# Altium PCB PCB2.PcbDoc (part 1 of 2)
Units mm, origin at the board's own origin, x right, y up, seen from the top; angles counter-clockwise.
Board outline 84.2 x 135.51 mm, 2 copper layers (Top Layer, Bottom Layer); 89 components, 95 nets, 365 pads, 160 vias.
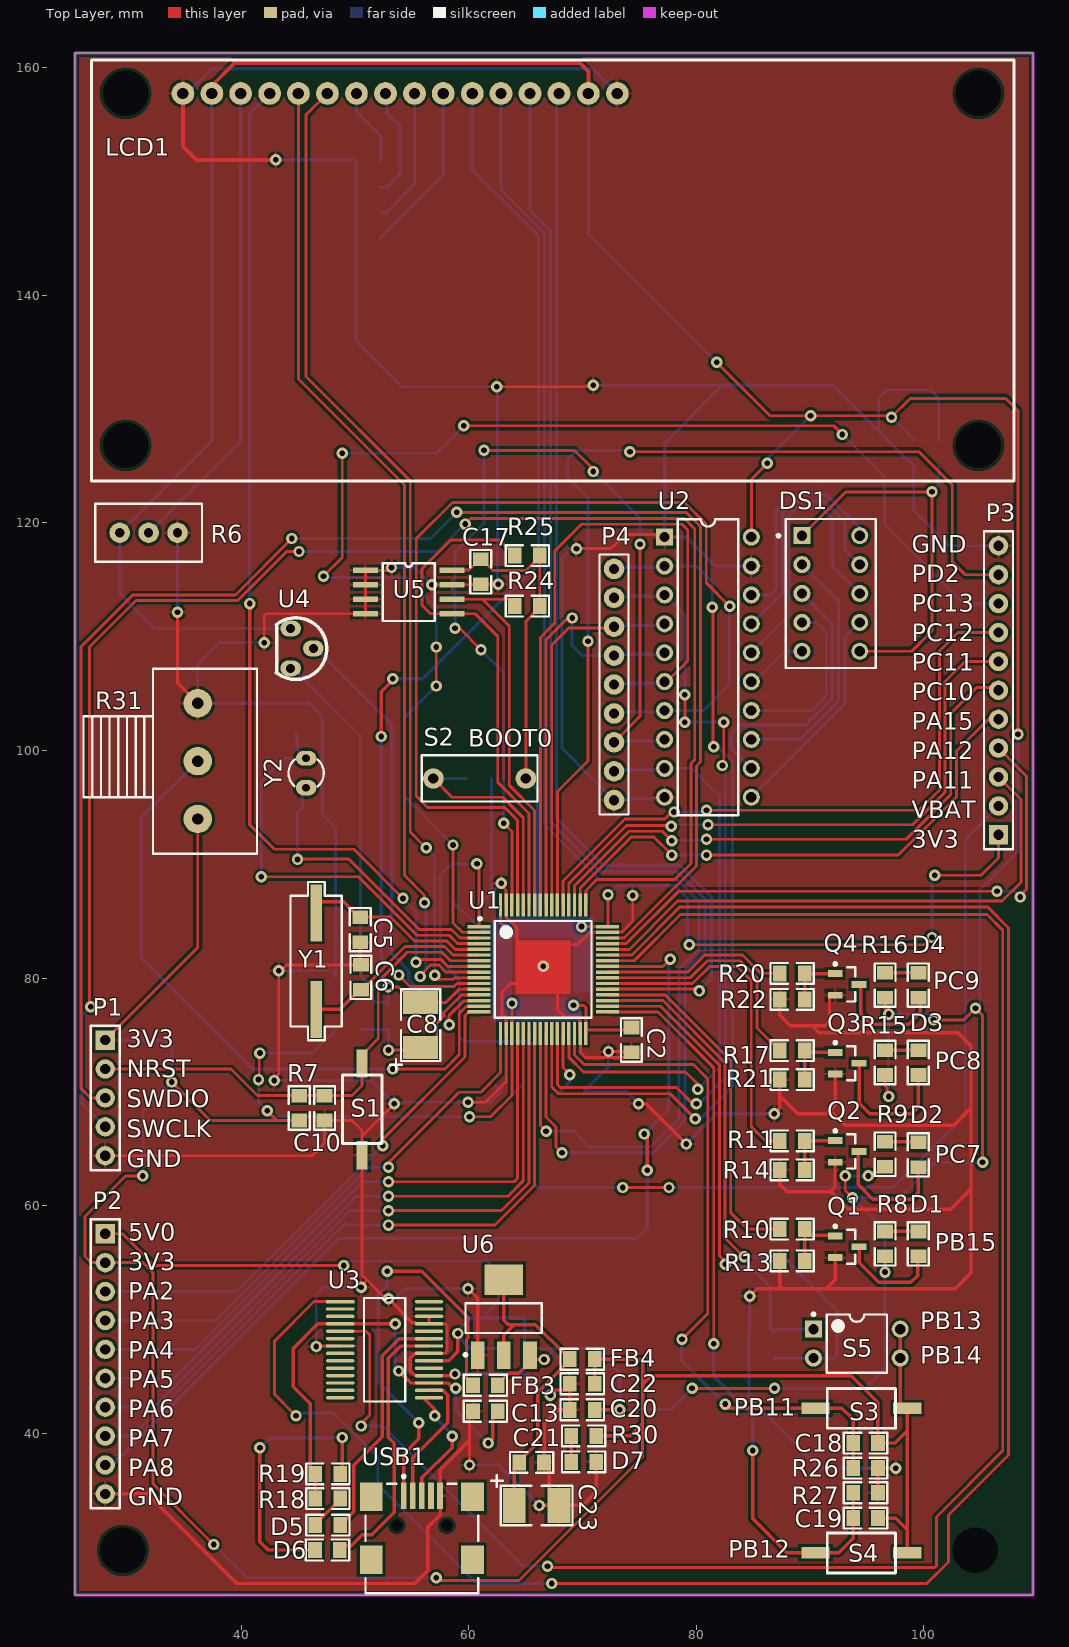
[diagram p0: Top Layer view]
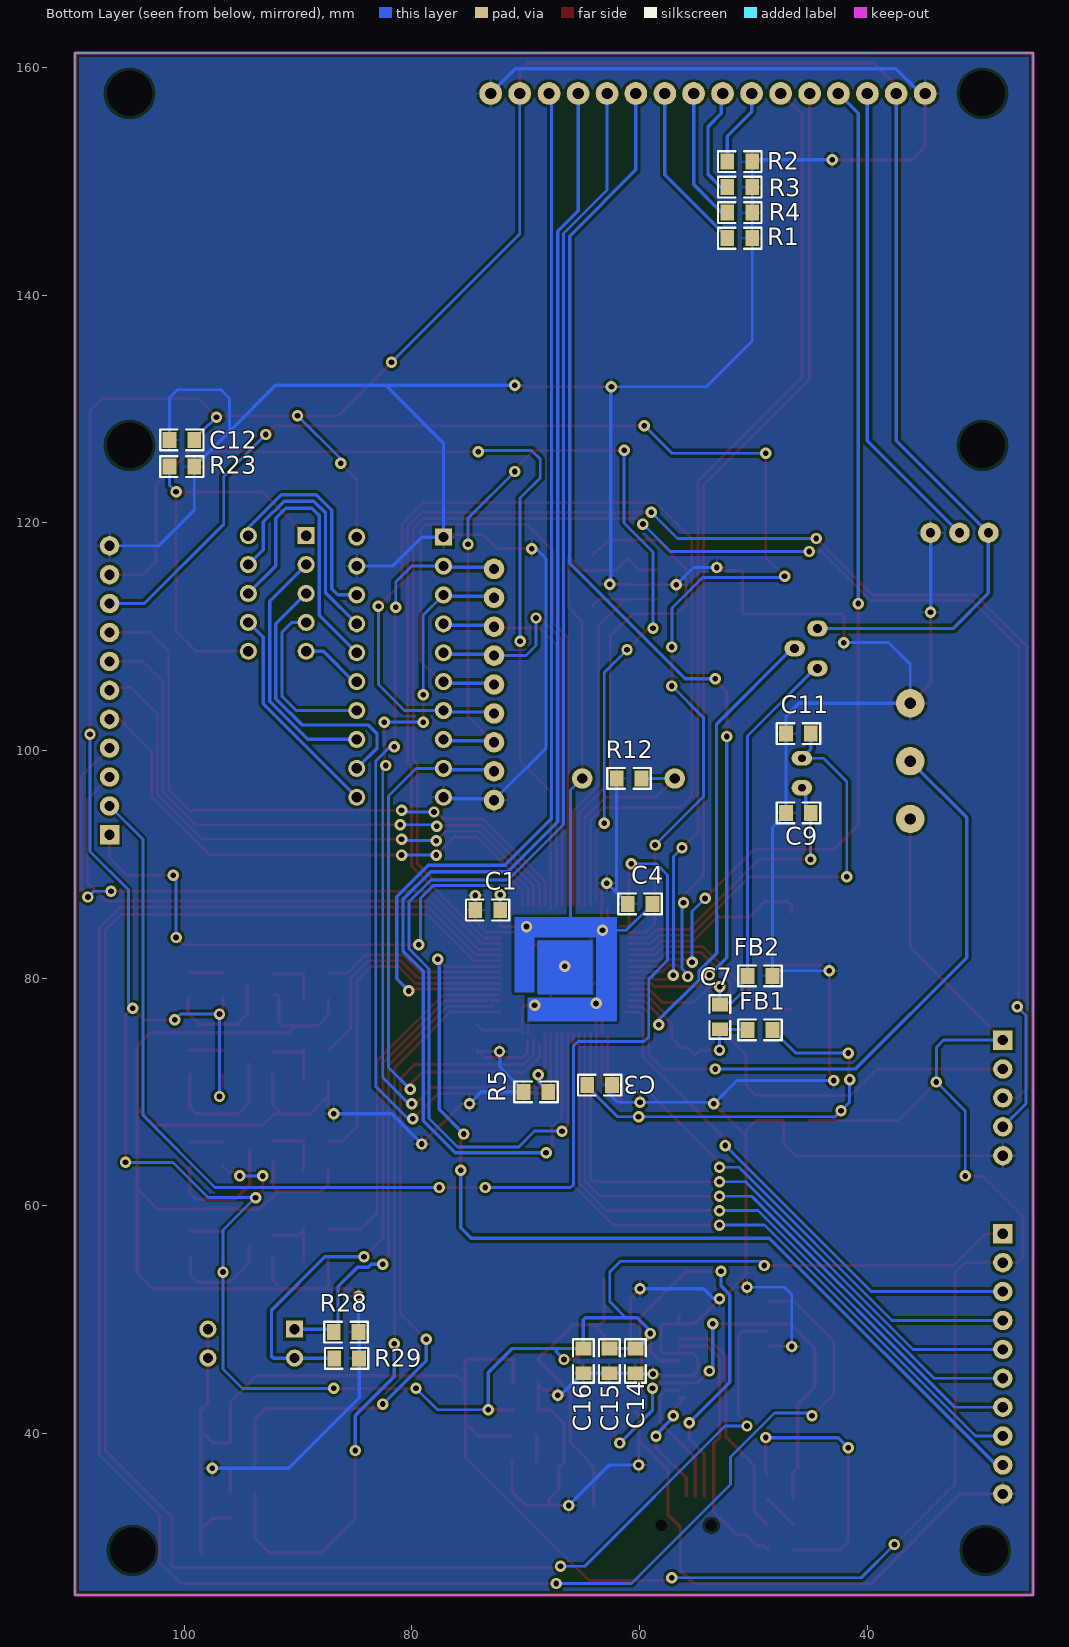
[diagram p1: Bottom Layer view, seen from below]

## Layer stack, top to bottom
Top Solder: solder mask 0.0102, Solder Resist, Dk 3.5
Top Layer: signal copper 0.0356
Dielectric 1: dielectric 0.32, FR-4, Dk 4.8
Bottom Layer: signal copper 0.0356
Bottom Solder: solder mask 0.0102, Solder Resist, Dk 3.5

## Board outline
25.4,25.781 25.4,161.29 109.601,161.29 109.601,25.781

## Design rules (kind name [scope] priority, off if disabled: settings)
Clearance [All] p1: gap=0.25 ignorepadtopadclearanceinfootprint=TRUE except(0.2: Arc-SMDPad Track-SMDPad)
PolygonConnect [All] p1: connectstyle=Relief reliefconductorwidth=0.254 reliefentries=4 polygonreliefangle="90 Angle" airgapwidth=0.254
RoutingVias [All] p1: holewidth=0.5 width=1 viastyle="Through Hole" minholewidth=0.5 minwidth=1 maxholewidth=0.5 maxwidth=1
SolderMaskExpansion [All] p1: expansion=0.102
Width [All] p1: maxlimit=1 minlimit=0.25 preferedwidth=0.3 minimp=50.000000 maximp=50.000000 favimp=50.000000
30 further rules are at their usual default settings.

## Components (designator, comment, footprint, x,y, rotation, side; value= is the part's Value field where it differs from the comment)
C1 "Cap" SMD_805 73.33,85.954 r90 bottom value=100nF
C2 "Cap" SMD_805 74.32,74.559 r180 top value=100nF
C3 "Cap" SMD_805 63.5,70.612 r270 bottom value=100nF
C4 "Cap" SMD_805 59.944,86.487 r90 bottom value=100nF
C5 "Cap" SMD_805 50.495,84.252 r180 top value=18pF
C6 "Cap" SMD_805 50.495,80.061 r0 top value=18pF
C7 "Cap" SMD_805 52.959,76.581 r180 bottom value=100nF
C8 "Cap Pol2" C_B 55.77,75.946 r0 top value=10uF
C9 "Cap" SMD_805 46.025,94.488 r90 bottom value=18pF
C10 "Cap" SMD_805 47.371,68.58 r180 top value=100nF
C11 "Cap" SMD_805 46.025,101.448 r90 bottom value=18pF
C12 "Cap" SMD_805 100.203,127.254 r90 bottom value=100nF
C13 "Cap" SMD_805 61.468,41.91 r90 top value=100nF
C14 "Cap" SMD_805 60.325,46.355 r0 bottom value=100nF
C15 "Cap" SMD_805 62.611,46.355 r0 bottom value=47nF
C16 "Cap" SMD_805 64.897,46.355 r0 bottom value=10nF
C17 "Cap" SMD_805 61.087,115.697 r180 top value=100nF
C18 "Cap" SMD_805 94.869,39.116 r90 top value=100nF
C19 "Cap" SMD_805 94.869,32.512 r90 top value=100nF
C20 "Cap" SMD_805 69.977,42.037 r90 top value=100nF
C21 "Cap" SMD_805 65.532,37.465 r270 top value=100nF
C22 "Cap" SMD_805 69.977,44.323 r90 top value=100nF
C23 "Cap Pol2" C_B 66.04,33.655 r270 top value=100uF
D1 "LED0" SMD_805 99.481,56.642 r0 top
D2 "LED0" SMD_805 99.481,64.465 r0 top
D3 "LED0" SMD_805 99.481,72.578 r0 top
D4 "LED0" SMD_805 99.481,79.375 r0 top
D5 "LED0" SMD_805 47.625,31.903 r90 top
D6 "LED0" SMD_805 47.589,29.718 r90 top
D7 "LED0" SMD_805 70.104,37.465 r90 top
DS1 "Dpy Red-CC" A 91.821,113.792 r0 top
FB1 "FERRIT" SMD_805 49.403,75.474 r270 bottom
FB2 "FERRIT" SMD_805 49.403,80.217 r270 bottom
FB3 "FERRIT" SMD_805 61.468,44.196 r90 top
FB4 "FERRIT" SMD_805 69.977,46.482 r90 top
LCD1 "LCD16*2" LCD2X16 83.439,143.002 r0 top
P1 "Header 5" HDR1X5 28.067,74.549 r270 top
P2 "Header 10" HDR1X10 28.067,57.531 r270 top
P3 "Header 11" HDR1X11 106.553,92.583 r90 top
P4 "Header 9" "ARAY 9" 72.771,108.966 r0 top
Q1 "BC817" SOT23 93.131,56.388 r270 top
Q2 "BC817" SOT23 93.131,64.77 r270 top
Q3 "BC817" SOT23 93.131,72.517 r270 top
Q4 "BC817" SOT23 93.131,79.441 r270 top
R1 "Res1" SMD_805 51.181,145.034 r270 bottom value=10k
R2 "Res1" SMD_805 51.181,151.765 r270 bottom value=10k
R3 "Res1" SMD_805 51.181,149.521 r270 bottom value=10k
R4 "Res1" SMD_805 51.181,147.278 r270 bottom value=10k
R5 "Res1" SMD_805 69.088,69.977 r90 bottom value=10K
R6 "RPot" pot 36.576,116.586 r90 top value=1K
R7 "Res1" SMD_805 45.085,68.58 r0 top value=10K
R8 "Res1" SMD_805 96.56,56.642 r0 top value=680
R9 "Res1" SMD_805 96.56,64.516 r0 top value=680
R10 "Res1" SMD_805 88.426,57.912 r90 top value=1k
R11 "Res1" SMD_805 88.426,65.659 r90 top value=1k
R12 "Res1" SMD_805 60.909,97.511 r90 bottom value=10K
R13 "Res1" SMD_805 88.426,55.118 r90 top value=10k
R14 "Res1" SMD_805 88.426,63.119 r90 top value=10k
R15 "Res1" SMD_805 96.56,72.578 r0 top value=680
R16 "Res1" SMD_805 96.56,79.375 r0 top value=680
R17 "Res1" SMD_805 88.426,73.594 r90 top value=1k
R18 "Res1" SMD_805 47.625,34.29 r270 top value=270
R19 "Res1" SMD_805 47.625,36.449 r270 top value=270
R20 "Res1" SMD_805 88.426,80.391 r90 top value=1k
R21 "Res1" SMD_805 88.426,71.054 r90 top value=10k
R22 "Res1" SMD_805 88.426,78.105 r90 top value=10k
R23 "Res1" SMD_805 100.203,124.968 r270 bottom value=330
R24 "Res1" SMD_805 65.151,112.649 r90 top value=4.7k
R25 "Res1" SMD_805 65.151,117.094 r90 top value=4.7k
R26 "Res1" SMD_805 94.869,36.957 r270 top value=4.7K
R27 "Res1" SMD_805 94.869,34.798 r270 top value=4.7K
R28 "Res1" SMD_805 85.776,48.92 r270 bottom value=4.7K
R29 "Res1" SMD_805 85.725,46.609 r270 bottom value=4.7K
R30 "Res1" SMD_805 70.104,39.751 r90 top value=1K
R31 "RPot" vlume 33.655,94.361 r0 top value=1K
S1 "SW-PB" smd_button 50.8,68.453 r270 top
S2 "SW-SPST" KEY1 60.833,97.536 r180 top
S3 "SW-PB" smd_button 94.488,42.037 r180 top
S4 "SW-PB" smd_button 94.488,29.337 r180 top
S5 "SW DIP-2" DIP-4 94.107,47.879 r0 top
U1 "STM32F103RET6" LQFP64 66.548,80.772 r0 top
U2 "M74HC541B1R" DIP20 81.026,107.315 r270 top
U3 "FT232RL" SOP28 48.715,51.57 r0 top
U4 "LM35" LM35-TO92 44.605,110.216 r0 top
U5 "24C512" SOP8 54.737,114.046 r0 top
U6 "AMS1117-3.3" SOT223 63.119,50.165 r0 top
USB1 "MICRO_USB" MINI_USB 55.753,31.877 r180 top
Y1 "14.7456MHZ" xtal_smd 46.558,81.458 r90 top
Y2 "32.768KHz" XTAL_RTC 45.669,97.942 r180 top

## Footprints (in the part's own frame and the unit in brackets; to place one, negate y for a bottom-side part, rotate by r counter-clockwise, add the part's x,y. Pads: shape width x height; smd on the part's side, far side on the other; paste and mask are expansions set on the pad)
A [mm] "LED, 7-Segment Display, 7.62 mm, RHD; 10 Leads; Row Space 5.08 mm; Pitch 2.54 mm"
  rect 1.5x1.5 hole 0.9: 1(-2.54,5.08)
  round 1.5 hole 0.9: 2(-2.54,2.54) 3(-2.54,0) 4(-2.54,-2.54) 5(-2.54,-5.08) 6(2.54,-5.08) 7(2.54,-2.54) 8(2.54,0) 9(2.54,2.54) 10(2.54,5.08)
  silkscreen extent -4.72,-6.55 3.95,6.55, body extent -3.95,-6.55 3.95,6.55, height 6.34
"ARAY 9" [mm]
  round 1.8 hole 0.9: 1(0,6.985) 2(0,4.445) 3(0,1.905) 4(0,-0.635) 5(0,-3.175) 6(0,-5.715) 7(0,-8.255) 8(0,-10.795) 9(0,-13.335)
  silkscreen extent -1.27,-14.6 1.27,8.25
C_B [mm]
  rect 3.1x2 smd: 1(-0.002,-2.041) 2(-0.002,1.896)
  silkscreen extent -2.67,-4.07 1.73,3.07, body extent -1.4,-1.78 1.4,1.78, height 2.23
DIP20 [mm] "DIP; 20 Leads; Row Spacing 7.62 mm; Pitch 2.54 mm"
  rect 1.5x1.5 hole 0.9: 1(-11.43,-3.81)
  round 1.5 hole 0.9: 2(-8.89,-3.81) 3(-6.35,-3.81) 4(-3.81,-3.81) 5(-1.27,-3.81) 6(1.27,-3.81) 7(3.81,-3.81) 8(6.35,-3.81) 9(8.89,-3.81) 10(11.43,-3.81) 11(11.43,3.81) 12(8.89,3.81) 13(6.35,3.81) 14(3.81,3.81) 15(1.27,3.81) 16(-1.27,3.81) 17(-3.81,3.81) 18(-6.35,3.81) 19(-8.89,3.81) 20(-11.43,3.81)
  silkscreen extent -13,-2.65 13,2.65
DIP-4 [mm] "DIP; 4 Leads; Row Spacing 7.62 mm; Pitch 2.54 mm"
  rect 1.5x1.5 hole 0.9: 1(-3.81,1.27)
  round 1.5 hole 0.9: 2(-3.81,-1.27) 3(3.81,-1.27) 4(3.81,1.27)
  silkscreen extent -3.93,-2.55 2.65,2.69, body extent -3.15,-2.5 3.15,2.5, height 5.6
HDR1X5 [mm] "Connector; Header; 5 Position"
  rect 1.7x1.7 hole 0.9: 1(0,0)
  round 1.7 hole 0.9: 2(2.54,0) 3(5.08,0) 4(7.62,0) 5(10.16,0)
  silkscreen extent -1.27,-1.27 11.43,1.27
HDR1X10 [mm] "Connector; Header; 10 Position"
  rect 1.7x1.7 hole 0.9: 1(0,0)
  round 1.7 hole 0.9: 2(2.54,0) 3(5.08,0) 4(7.62,0) 5(10.16,0) 6(12.7,0) 7(15.24,0) 8(17.78,0) 9(20.32,0) 10(22.86,0)
  silkscreen extent -1.27,-1.27 24.13,1.27
HDR1X11 [mm] "Connector; Header; 11 Position"
  rect 1.7x1.7 hole 0.9: 1(0,0)
  round 1.7 hole 0.9: 2(2.54,0) 3(5.08,0) 4(7.62,0) 5(10.16,0) 6(12.7,0) 7(15.24,0) 8(17.78,0) 9(20.32,0) 10(22.86,0) 11(25.4,0)
  silkscreen extent -1.27,-1.27 26.67,1.27
KEY1 [mm]
  round 1.8 hole 0.9: 1(-4.191,0) 2(3.937,0)
  silkscreen extent -5.21,-2.03 4.95,2.03, body extent -5.21,-2.03 4.95,2.03, height 7.1
LCD2X16 [mm]
  round 0 hole 4: 0(-53.575,-16.2) 0(-53.575,14.725) 0(21.35,-16.2) 0(21.35,14.725)
  round 2 hole 1: 1(-48.55,14.725) 2(-46,14.725) 3(-43.475,14.725) 4(-40.925,14.725) 5(-38.4,14.725) 6(-35.85,14.725) 7(-33.3,14.725) 8(-30.75,14.725) 9(-28.2,14.725) 10(-25.675,14.725) 11(-23.125,14.725) 12(-20.6,14.725) 13(-18.05,14.725) 14(-15.5,14.725) 15(-12.925,14.725) 16(-10.375,14.725)
  silkscreen extent -56.57,-19.32 24.48,17.65
LM35-TO92 [mm]
  oval 1.8x1.4 hole 0.8: 1(-0.25,0.5) 2(1.75,-1.25) 3(-0.25,-3)
  silkscreen extent -1.49,-3.98 2.92,1.44
LQFP64 [mm]
  rect 2x0.3 smd: 1(-5.646,3.75) 2(-5.646,3.25) 3(-5.646,2.75) 4(-5.646,2.25) 5(-5.646,1.75) 6(-5.646,1.25) 7(-5.646,0.75) 8(-5.646,0.25) 9(-5.646,-0.25) 10(-5.646,-0.75) 11(-5.646,-1.25) 12(-5.646,-1.75) 13(-5.646,-2.25) 14(-5.646,-2.75) 15(-5.646,-3.25) 16(-5.646,-3.75) 33(5.646,-3.75) 34(5.646,-3.25) 35(5.646,-2.75) 36(5.646,-2.25) 37(5.646,-1.75) 38(5.646,-1.25) 39(5.646,-0.75) 40(5.646,-0.25) 41(5.646,0.25) 42(5.646,0.75) 43(5.646,1.25) 44(5.646,1.75) 45(5.646,2.25) 46(5.646,2.75) 47(5.646,3.25) 48(5.646,3.75)
  rect 0.3x2 smd: 17(-3.75,-5.646) 18(-3.25,-5.646) 19(-2.75,-5.646) 20(-2.25,-5.646) 21(-1.75,-5.646) 22(-1.25,-5.646) 23(-0.75,-5.646) 24(-0.25,-5.646) 25(0.25,-5.646) 26(0.75,-5.646) 27(1.25,-5.646) 28(1.75,-5.646) 29(2.25,-5.646) 30(2.75,-5.646) 31(3.25,-5.646) 32(3.75,-5.646) 49(3.75,5.646) 50(3.25,5.646) 51(2.75,5.646) 52(2.25,5.646) 53(1.75,5.646) 54(1.25,5.646) 55(0.75,5.646) 56(0.25,5.646) 57(-0.25,5.646) 58(-0.75,5.646) 59(-1.25,5.646) 60(-1.75,5.646) 61(-2.25,5.646) 62(-2.75,5.646) 63(-3.25,5.646) 64(-3.75,5.646)
  silkscreen extent -5.67,-4.25 4.25,4.57
MINI_USB [mm]
  rect 0.5x2.3 smd mask+0.04: 1(1.468,-2.626) 2(0.668,-2.626) 3(-0.132,-2.626) 4(-0.932,-2.626) 5(-1.732,-2.626)
  rect 2x2.5 smd: 6(-4.582,-2.526) 7(-4.582,2.974) 8(4.318,-2.526) 9(4.318,2.974)
  round 0.6 hole 1 unplated: MH1(-2.332,-0.026) MH2(2.068,-0.026)
  silkscreen extent -5.08,-4.45 4.82,5.92, body extent -5.08,-3.38 4.82,5.87, height 3.93
pot [mm]
  round 1.8 hole 0.8: 1(2.54,2.159) 2(2.54,7.239) 3(2.54,4.699)
  silkscreen extent 0,0 5.08,9.4
SMD_805 [mm]
  rect 1.4x1.2 smd: 1(0.025,1.092) 2(0.025,-1.092)
  silkscreen extent -0.89,-1.91 0.94,1.91, body extent -0.66,-1.09 0.71,1.12, height 1.1
smd_button [mm]
  rect 2.5x1 smd: 1(4.013,-0.178) 2(-4.039,-0.178)
  silkscreen extent -3.02,-1.9 2.98,1.6
SOP8 [mm]
  rect 2.2x0.5 smd: 1(-3.81,1.778) 2(-3.81,0.508) 3(-3.81,-0.762) 4(-3.81,-2.032) 5(3.806,-2.032) 6(3.806,-0.762) 7(3.806,0.508) 8(3.806,1.778)
  silkscreen extent -2.29,-2.67 2.29,2.41
SOP28 [mm]
  rect 2.5x0.3 smd: 1(0,0)
  oval 2.5x0.3 smd: 2(0,-0.65) 3(0,-1.3) 4(0,-1.95) 5(0,-2.6) 6(0,-3.25) 7(0,-3.9) 8(0,-4.55) 9(0,-5.2) 10(0,-5.85) 11(0,-6.5) 12(0,-7.15) 13(0,-7.8) 14(0,-8.45) 15(7.8,-8.45) 16(7.8,-7.8) 17(7.8,-7.15) 18(7.8,-6.5) 19(7.8,-5.85) 20(7.8,-5.2) 21(7.8,-4.55) 22(7.8,-3.9) 23(7.8,-3.25) 24(7.8,-2.6) 25(7.8,-1.95) 26(7.8,-1.3) 27(7.8,-0.65) 28(7.8,0)
  silkscreen extent 2.08,-8.78 5.71,0.33
SOT23 [mm]
  rect 0.6x1.3 smd: 1(-0.95,-0.923) 2(0.95,-0.923) 3(0,1.177)
  silkscreen extent -1.92,-1.05 1.5,0.83, body extent -1.5,-0.57 1.5,0.83, height 1.1
SOT223 [mm]
  rect 1.2x2.4 smd: 1(-2.337,-3.302) 2(-0.034,-3.302) 3(2.265,-3.302)
  rect 3.4x2.7 smd: 2(-0.034,3.327)
  silkscreen extent -3.53,-3.4 3.3,1.25, body extent -3.4,-1.9 3.3,1.8, height 1.7
vlume [mm]
  round 2.5 hole 1: 1(2.54,-0.381) 2(2.54,9.779) 3(2.54,4.699)
  silkscreen extent -7.49,-3.43 7.75,12.83
XTAL_RTC [mm]
  oval 1.8x1.4 hole 0.7: 1(-0.051,1.22)
  oval 1.8x1.3 hole 0.7: 2(-0.051,-1.372)
  silkscreen extent -1.6,-1.27 1.5,1.09
xtal_smd [mm]
  rect 5x1 smd: 1(-4.216,-0.051) 2(4.267,-0.051)
  silkscreen extent -6.93,-2.29 6.98,2.21

## Part data
C1 C2 C3 C4 C5 C6 C7 C9 C10 C11 C12 C13 C14 C15 C16 C17 C18 C19 C20 C21 C22: "Capacitor", LatestRevisionDate=17-Jul-2002, LatestRevisionNote="Re-released for DXP Platform.", PackageReference=RAD-0.3, Published=8-Jun-2000, Publisher="Altium Limited"
C8 C23: "Polarized Capacitor (Axial)", LatestRevisionDate=17-Jul-2002, LatestRevisionNote="Re-released for DXP Platform.", PackageReference=POLAR0.8, Published=8-Jun-2000, Publisher="Altium Limited"
D1 D2 D3 D4 D5 D6 D7: "Typical INFRARED GaAs LED", LatestRevisionDate=08-Jul-2005, LatestRevisionNote="Mech Layer 1 removed.", PackageReference=LED-0, Published=8-Jun-2000, Publisher="Altium Limited"
DS1: "7.62 mm Black Surface HER 7-Segment Display: CC, RH DP", Colour="High Efficiency Red (HER)", ComponentLink1Description="Manufacturer Link", ComponentLink1URL=http://www.agilent.com/, DatasheetVersion=19-Feb-2002, LatestRevisionDate=17-Dec-2003, LatestRevisionNote="Schematic revised, PCB Footprint replaced.", MinimumIntensity="360 ucd", Note="IF = 5 mA", PackageDescription="LED, 7-Segment Display, 7.62 mm, RHD; 10 Leads; Row Space 5.08 mm; Pitch 2.54 mm", PackageReference=A, PackageVersion=11-Feb-2002, Published=8-Jun-2000, Publisher="Altium Limited"
FB1 FB2 FB3 FB4: library part Inductor, "Inductor", Code_IEC=1005, Code_JEITA=0402, LatestRevisionDate=29-May-2009, LatestRevisionNote="IPC-7351 Footprint Added.", PackageDescription="Chip Inductor", PackageReference=0402-A, Published=8-Jun-2000, Publisher="Altium Limited"
P1: "Header, 5-Pin", LatestRevisionDate=17-Jul-2002, LatestRevisionNote="Re-released for DXP Platform.", Publisher="Altium Limited"
P2: "Header, 10-Pin", LatestRevisionDate=17-Jul-2002, LatestRevisionNote="Re-released for DXP Platform.", Publisher="Altium Limited"
P3: "Header, 11-Pin", LatestRevisionDate=17-Jul-2002, LatestRevisionNote="Re-released for DXP Platform.", Publisher="Altium Limited"
P4: "Header, 9-Pin", LatestRevisionDate=17-Jul-2002, LatestRevisionNote="Re-released for DXP Platform.", Publisher="Altium Limited"
Q1 Q2 Q3 Q4: library part 2N3904, "NPN General Purpose Amplifier", Code_JEDEC=TO-92A, ComponentLink1Description="Manufacturer Link", ComponentLink1URL=http://www.fairchildsemi.com/, ComponentLink2Description=Datasheet, ComponentLink2URL=http://www.fairchildsemi.com/ds/2N%2F2N3904.pdf, DatasheetVersion=1997, LatestRevisionDate=15-Jan-2003, LatestRevisionNote="PCB Footprint 'BCY-W3/D4.7' replaced", PackageReference=TO-92A, PackageVersion=Sep-1998, Published=8-Jun-2000, Publisher="Altium Limited"
R1 R2 R3 R4 R5 R7 R8 R9 R10 R11 R12 R13 R14 R15 R16 R17 R18 R19 R20 R21 R22 R23 R24 R25 R26 R27 R28 R29 R30: "Resistor", LatestRevisionDate=17-Jul-2002, LatestRevisionNote="Re-released for DXP Platform.", PackageReference=AXIAL-0.3, Published=8-Jun-2000, Publisher="Altium Limited"
R6 R31: "Potentiometer", LatestRevisionDate=17-Jul-2002, LatestRevisionNote="Re-released for DXP Platform.", PackageReference=VR5, Published=8-Jun-2000, Publisher="Altium Limited", Set Position=0.5, Sim Note="Enter the Resistance value and the set point into parameter fields."
  R31: PackageDescription="Variable Resistor, Thru-Hole; 3 Leads"
S1 S3 S4: "Switch", LatestRevisionDate=17-Jul-2002, LatestRevisionNote="Re-released for DXP Platform.", PackageReference=SPST-2, Published=24-Mar-1999, Publisher="Altium Limited"
S2: "Single-Pole, Single-Throw Switch", LatestRevisionDate=17-Jul-2002, LatestRevisionNote="Re-released for DXP Platform.", PackageReference=SPST-2, Published=24-Mar-1999, Publisher="Altium Limited"
S5: "DIP Switch, 2 Position, SPST", LatestRevisionDate=17-Jul-2002, LatestRevisionNote="Re-released for DXP Platform.", PackageReference=DIP-4, Published=24-Mar-1999, Publisher="Altium Limited"
U1: library part STM32F103R8T6, "STM32 ARM-based 32-bit MCU with 64 Kbytes Flash, 64-pin LQFP, Industrial Temperature", ComponentLink1Description="Manufacturer Link", ComponentLink1URL=www.st.com/stm32, ComponentLink2Description=Datasheet, ComponentLink2URL=http://www.st.com/stonline/products/literature/ds/13587.pdf, DatasheetVersion="rev6, Mar-2008", PackageDescription="64-Pin Low-Profile Quad Flat Pack, 10 x 10 mm Body, 0.5 mm Pitch (LQFP64)", PackageReference=LQFP64, PackageVersion=Mar-2008, Published=30-May-2008, Publisher="Altium Limited"
U2: "Octal Bus Buffer with 3 State Outputs (Non Inverted)", Code_JEDEC=MS-015-AE, ComponentLink1Description="Manufacturer Link", ComponentLink1URL=http://www.st.com/, DatasheetVersion=Oct-1993, LatestRevisionDate=06-Jun-2005, LatestRevisionNote="Stylized 3D Model Added.", PackageDescription="DIP; 20 Leads; Row Spacing 7.62 mm; Pitch 2.54 mm", PackageReference=DIP20, PackageVersion=Jun-1998, Published=8-Jun-2000, Publisher="Altium Limited"
U4: "LM35 Temperature Sensor", ComponentLinkURL=www.picpars.com, Designer="Seyed Mohsen Ghasemain", E-mail=picpars@gmail.com
U5: library part 24Cxx
U6: library part LD1117DT33
Y1 Y2: library part XTAL, "Crystal Oscillator", LatestRevisionDate=17-Jul-2002, LatestRevisionNote="Re-released for DXP Platform.", PackageReference=R38, Published=8-Jun-2000, Publisher="Altium Limited"

## Free pads (board coordinates)
  round 2.5 hole 4: 2(29.61,29.718) 2(104.531,29.718)

## Via types
v1: diameter 1, hole 0.5, Top Layer to Bottom Layer, 160 vias

## Nets (pads, with @x,y where several pads share a name; then routed paths per layer and width w, separated by ;. In a path a pad name is that pad's centre, name@x,y a point inside that pad or via, vN(x,y) a via of type N, cw(c..) or ccw(c..) an arc to the next point about the centre after c; other vN are vias at no path point)
3V3: C1.2 C2.2 C3.2 C4.2 C17.2 C18.2 C19.2 C22.2 FB1.1 FB4.2 P1.1 P2.2 P3.1 R7.2 R24.2 R25.2 R30.2 R31.1 S2.1 S3.2 S4.2 S5.3 S5.4 U1.19 U1.32 U1.48 U1.64 U5.8 | length 373.2
  Top Layer w0.25: P1.1 36.195,82.677 R31.1 ; v1(31.369,62.611) 29.845,62.611 26.289,59.055 26.289,55.544 26.842,54.991 P2.2 28.194,54.864 28.321,54.991 31.369,54.991 32.258,54.102 32.258,35.56 v1(37.592,30.226) ; v1(33.909,70.866) 37.287,67.488 43.129,67.488 ; v1(41.529,71.079) 41.593,71.143 41.593,73.343 v1(41.656,73.406) ; v1(42.291,68.326) 43.129,67.488 ; R7.2 43.129,67.488 ; v1(57.15,27.305) 57.404,27.051 64.422,27.051 75.286,37.915 75.286,40.869 75.286,42.799 ; U5.8 58.565,115.846 60.018,115.846 60.962,116.789 C17.2 61.162,116.789 62.127,115.824 65.048,115.824 R25.2@66.243,117.019 ; v1(60.071,67.818) 61.924,67.818 63.798,69.692 U1.19 63.798,75.996 63.803,76.001 63.803,77.764 v1(63.808,77.769) ; U1.64@62.823,86.066 62.798,86.041 62.798,84.852 63.246,84.404 v1(63.246,84.201) ; S2.1 65.024,111.355 66.243,112.574 R24.2 R25.2@66.243,117.019 ; R25.2 R25.2@66.243,117.019 ; v1(69.211,77.597) 70.104,77.597 70.298,77.403 U1.32@70.298,75.43 ; v1(69.917,84.522) U1.48 72.238,84.566 v1(72.238,87.325) ; U1.32 U1.32@70.298,75.43 ; C2.2@74.27,75.895 73.795,75.42 70.307,75.42 U1.32@70.298,75.43 ; v1(79.375,82.931) 100.076,82.931 v1(100.711,83.566) ; v1(100.965,89.027) 105.029,89.027 106.553,90.551 P3.1
  Top Layer w0.3: C22.2 FB4.2 75.11,46.507 75.286,46.332 75.286,44.323 ; R30.2 74.193,39.776 75.286,40.869 ; 75.286,42.799 75.286,44.323 ; C19.2 97.511,32.537 98.527,31.521 ; S5.4 S5.3 97.917,42.565 98.267,42.215 S3.2 98.527,40.234 ; S4.2 98.527,31.521 ; 75.286,44.323 76.033,45.07 93.614,45.07 95.961,42.723 C18.2 97.434,39.141 98.527,40.234 ; 98.527,31.521 98.527,40.234
  Bottom Layer w0.25: P1.1 33.274,74.549 33.909,73.914 v1(33.909,70.866) 31.369,68.326 v1(31.369,62.611) ; v1(37.592,30.226) 40.513,27.305 v1(57.15,27.305) ; v1(41.529,71.079) 41.529,69.088 v1(42.291,68.326) 42.799,67.818 v1(60.071,67.818) 61.924,67.818 C3.2@64.592,70.487 ; v1(41.656,73.406) 46.268,73.406 47.736,74.874 47.836,74.874 48.311,75.349 FB1.1 ; C4.2 58.852,86.412 59.327,85.937 59.427,85.937 61.163,84.201 v1(63.246,84.201) ; S2.1 66.04,96.52 66.04,84.328 ; C1.2 v1(72.238,87.325) 73.036,88.124 78.117,88.124 79.231,87.01 79.231,83.075 v1(79.375,82.931) ; v1(100.711,83.566) 100.711,88.773 v1(100.965,89.027)
3V3A: C7.2 C8.1 FB1.2 U1.13 | length 15.5
  Top Layer w0.25: v1(52.959,73.67) 54.676,73.67 55.105,73.242 C8.1 56.318,73.905 57.193,74.78 57.193,76.028 57.798,76.633 57.798,76.942 59.374,78.518 59.756,78.518 59.76,78.522 U1.13
  Bottom Layer w0.25: FB1.2 50.535,75.489 C7.2 52.959,75.463 v1(52.959,73.67)
5V0: C12.2 C14.2 C15.2 C16.2 C20.2 FB3.2 LCD1.2 LCD1.15 P2.1 R6.2 R8.2 R9.2 R15.2 R16.2 U2.20 U3.20 U4.1 U6.3 | length 402.6
  Top Layer w0.25: P2.1 29.591,57.531 32.385,54.737 v1(49.022,54.737) ; LCD1.2@37.205,158.185 37.439,157.952 LCD1.2 ; v1(79.629,43.942) v1(86.868,43.942) ; v1(81.788,134.112) 86.487,129.413 v1(90.043,129.413) 97.028,129.413 v1(97.155,129.286) 98.806,130.937 107.188,130.937 108.272,129.853 v1(108.272,101.414) ; U2.20 84.836,123.825 v1(86.233,125.222) ; v1(93.091,62.611) 93.091,61.341 v1(93.726,60.706) ; v1(95.123,62.611) 95.326,62.611 95.664,62.949 96.11,62.949 R9.2 ; v1(96.585,54.164) R8.2 ; R15.2 96.585,70.511 96.757,70.339 96.757,69.74 v1(96.901,69.596) ; R16.2 96.585,77.308 96.901,76.992 v1(96.901,76.835) ; v1(100.838,76.327) 103.505,76.327 v1(104.531,77.353) 105.156,76.728 v1(105.156,63.803)
  Top Layer w0.3: U3.20 58.242,46.37 59.055,47.183 v1(59.055,48.768) ; FB3.2 62.56,44.321 63.502,45.263 64.384,45.263 65.384,46.263 U6.3 65.765,46.482 v1(66.624,46.482) ; C20.2 v1(73.279,42.062)
  Top Layer w0.35: LCD1.2@37.205,158.185 39.421,160.401 69.771,160.401 70.514,159.658 LCD1.15
  Bottom Layer w0.25: v1(49.022,54.737) 49.403,55.118 61.657,55.118 62.611,54.164 62.611,51.581 61.169,50.14 ; v1@58.928,49.114 59.02,49.022 v1@59.055,49.022 ; LCD1.15 70.514,145.386 v1(81.788,134.112) ; v1(73.279,42.062) 77.749,42.062 v1(79.629,43.942) ; v1(86.233,125.222) 86.233,125.603 v1(90.043,129.413) ; v1(86.868,43.942) 94.869,43.942 96.585,45.658 v1(96.585,54.164) 96.585,57.847 v1(93.726,60.706) 97.892,60.706 100.99,63.803 v1(105.156,63.803) ; v1(93.091,62.611) v1(95.123,62.611) ; v1(96.901,69.596) v1(96.901,76.835) 100.33,76.835 v1(100.838,76.327) ; v1(97.155,129.286) 97.774,128.667 97.823,128.667 99.111,127.379 C12.2 ; v1(104.531,77.353) 104.902,77.724 104.902,87.757 108.272,91.127 v1(108.272,101.414)
  Bottom Layer w0.3: LCD1.2 37.439,127.228 R6.2 29.337,113.792 32.413,110.716 U4.1 ; v1(59.055,48.768) 59.055,48.546 59.052,48.544 60.149,47.447 C14.2 C15.2 ; v1@59.055,49.022 60.173,50.14 61.169,50.14 64.747,50.14 64.922,49.964 C16.2 67.31,47.447 ; v1(66.624,46.482) 67.31,47.168 67.31,47.447 ; v1(73.279,42.062) 73.279,45.339 71.171,47.447 67.31,47.447
ADClm35: U1.14 U4.2 | length 42.1
  Top Layer w0.25: v1(58.298,75.895) 58.298,76.735 59.56,77.997 60.027,77.997 60.052,78.022 U1.14
  Bottom Layer w0.3: U4.2 46.555,108.966 53.224,102.297 53.224,85.603 53.21,85.589 53.21,82.175 54.748,80.637 54.748,79.868 58.298,76.318 v1(58.298,75.895)
ADCvolume: R31.3 U1.15 | length 57.4
  Top Layer w0.25: v1(53.34,72.009) 57.912,72.009 59.173,73.27 59.173,76.903 59.767,77.497 60.877,77.497 U1.15
  Bottom Layer w0.3: R31.3 31.242,94.107 31.242,81.788 41.021,72.009 v1(53.34,72.009)
BOOT0: R12.2 S2.2 U1.60 | length 19.9
  Top Layer w0.25: S2.2 58.547,95.885 62.992,95.885 64.798,94.079 U1.60
  Bottom Layer w0.25: S2.2 R12.2
D4: LCD1.11 U1.11 | length 95.3
  Top Layer w0.25: v1(53.848,80.264) 54.85,79.262 58.704,79.262 58.96,79.518 59.342,79.518 59.346,79.522 U1.11
  Top Layer w0.3: v1(52.324,101.219) 52.324,105.156 53.34,106.172 v1(53.34,106.299)
  Bottom Layer w0.3: v1(52.324,101.219) 52.324,81.788 v1(53.848,80.264) ; v1(53.34,106.299) 55.973,106.299 66.138,116.464 66.138,145.195 60.314,151.019 LCD1.11
D5: LCD1.12 U1.24 | length 124.3
  Top Layer w0.25: U1.24@66.298,75.333 66.298,67.052 v1(66.802,66.548)
  Bottom Layer w0.25: LCD1.12 62.839,149.236 66.663,145.412 66.663,93.504 71.543,88.624 78.325,88.624 80.25,86.699 80.25,82.569 79.737,82.056 78.481,80.8 78.481,67.667 75.983,65.168 70.595,65.168 69.215,66.548 v1(66.802,66.548)
D6: LCD1.13 U1.25 | length 124.4
  Top Layer w0.25: U1.25 66.798,67.789 67.677,66.91 67.677,65.165 v1(68.199,64.643)
  Bottom Layer w0.3: LCD1.13 65.389,147.429 67.188,145.63 67.188,93.721 71.554,89.355 78.336,89.355 80.775,86.916 80.775,82.351 79.006,80.582 79.006,67.449 76.2,64.643 v1(68.199,64.643)
D7: LCD1.14 U1.37 | length 97.3
  Top Layer w0.25: U1.37 79.906,79.022 80.061,78.867 v1(80.264,78.867) v1@80.12,79.011
  Bottom Layer w0.25: 67.738,93.984 67.713,94.009 67.713,157.501 LCD1.14
  Bottom Layer w0.3: 67.738,93.984 71.817,89.905 78.564,89.905 81.325,87.144 81.325,79.928 v1(80.264,78.867)
EN: LCD1.6 U1.10 | length 87
  Top Layer w0.25: LCD1.6 45.72,155.858 45.72,132.842 54.864,123.698 54.864,92.837 v1(56.261,91.44) ; v1(57.017,80.258) 57.029,80.258 57.398,79.889 58.624,79.889 58.753,80.018 59.135,80.018 59.139,80.022 U1.10
  Bottom Layer w0.25: v1(56.261,91.44) 57.017,90.684 v1(57.017,80.258)
GND: C1.1 C2.1 C3.1 C4.1 C5.1 C6.1 C9.1 C10.1 C11.1 C12.1 C13.1 C14.1 C15.1 C16.1 C17.1 C20.1 C21.1 C22.1 C23.2 D7.2 FB2.1 LCD1.1 LCD1.16 P1.5 P2.10 P3.11 P4.9 Q1.2 Q2.2 Q3.2 Q4.2 R1.1 R2.1 R3.1 R4.1 R5.1 R6.1 R12.1 R13.1 R14.1 R21.1 R22.1 R23.1 R26.1 R27.1 R28.1 R29.1 R31.2 S1.1 U1.18 U1.31 U1.47 U1.63 U2.1 U2.10 U2.19 U3.7 U3.18 U3.21 U3.25 U3.26 U5.1 U5.2 U5.3 U5.4 U5.7 U6.1 USB1.5 | length 775.3
  Top Layer w0.25: P1.5 46.228,64.389 47.346,65.507 C10.1 49.733,67.488 50.622,66.599 50.622,66.116 ; v1(42.037,109.474) 42.037,111.868 42.183,112.014 U5.4 U5.3 U5.2 U5.1 52.959,115.824 v1(53.213,116.078) ; v1(42.926,70.993) 42.926,71.196 43.307,71.577 v1(43.307,80.645) 43.51,80.645 44.018,81.153 C6.1 ; v1(46.609,47.625) 46.654,47.67 U3.7 ; v1(50.546,52.832) 50.546,52.959 51.054,53.467 ; v1(52.959,51.816) 52.705,51.816 51.054,53.467 ; v1(53.467,68.961) 50.622,66.116 ; U3.21 56.525,47.03 57.893,47.03 58.09,47.227 58.09,49.46 57.939,49.61 56.525,49.61 U3.25 ; v1(56.769,114.554) U5.7 61.011,114.554 C17.1 ; v1(59.944,69.088) 61.468,69.088 63.298,70.918 U1.18@63.298,74.469 ; v1(62.458,131.953) 70.739,131.953 v1@70.866,132.08 ; v1(62.865,88.341) 62.865,88.138 63.273,87.73 63.273,86.443 U1.63 63.323,86.393 63.323,85.283 63.53,85.076 63.608,85.076 64.26,84.424 64.26,83.06 ; U1.18 63.273,75.151 63.273,76.427 62.923,76.777 62.923,78.773 63.672,79.522 64.44,79.522 ; 67.437,82.55 67.818,82.931 69.563,82.931 70.654,84.022 U1.47 73.044,84.022 73.069,84.047 73.461,84.047 74.422,85.008 v1(74.422,87.249) ; 67.818,79.629 67.818,77.216 68.453,76.581 69.52,76.581 69.773,76.328 69.773,75.151 U1.31 ; v1(69.469,117.729) 72.514,117.729 73.77,118.985 76.976,118.985 U2.1 ; U1.31@69.823,74.549 69.823,73.471 70.269,73.025 73.584,73.025 C2.1@74.102,73.543 ; v1(72.288,73.543) C2.1@74.102,73.543 ; C2.1@74.27,73.711 C2.1@74.102,73.543 ; C2.1 74.219,73.543 C2.1@74.102,73.543 ; 50.622,66.116 S1.1 50.622,53.899 51.054,53.467
  Top Layer w0.3: P2.10 31.75,34.671 39.624,26.797 55.245,26.797 56.388,27.94 56.388,31.75 57.485,32.847 USB1.5 57.485,36.784 60.071,39.37 ; v1(34.417,112.141) 34.417,105.918 R31.2 ; C5.1 50.47,81.204 C6.1 ; v1(52.959,51.816) 55.055,49.72 55.315,49.72 55.415,49.62 U3.25 U3.26 ; U3.21 55.287,47.02 54.865,46.598 54.865,45.492 55.287,45.07 U3.18 58.47,45.07 58.612,45.212 v1(58.801,45.212) ; v1(59.944,52.705) 60.782,51.867 U6.1 ; v1(60.071,37.211) 60.071,39.37 ; C13.1 60.071,41.631 60.071,39.37 ; C17.1 v1(62.611,114.605) ; v1(66.199,33.657) C23.2 ; v1(67.183,43.348) 67.634,43.798 68.435,43.798 C22.1@68.885,44.248 ; C22.1 C22.1@68.885,44.248 ; v1@70.866,132.08 v1(70.942,132.08) ; D7.2 71.196,34.849 70.004,33.657 C23.2 ; v1(74.924,68.961) 75.582,68.961 v1(79.121,65.422) ; v1(84.684,52.045) 84.706,52.045 85.367,52.705 87.63,52.705 ; v1(86.859,68.072) 87.334,68.547 87.334,69.638 ; R13.1 87.334,53.001 87.63,52.705 ; R14.1 87.334,61.891 88.011,61.214 91.756,61.214 ; R21.1 87.334,69.638 ; R22.1 87.334,76.75 88.265,75.819 90.17,75.819 ; Q1.2 92.208,53.473 91.44,52.705 ; Q2.2 92.191,63.803 92.191,61.649 91.756,61.214 ; Q3.2 92.208,68.84 91.44,68.072 ; Q4.2 91.858,78.491 91.708,78.341 91.708,76.205 91.322,75.819 90.17,75.819 ; R27.1 R26.1 v1(97.536,36.932) ; C23.2 67.936,34.207 67.074,35.069 67.074,36.99 C21.1 66.624,40.852 67.835,42.062 C20.1 C22.1@68.885,44.248 ; 87.334,69.638 88.9,68.072 91.44,68.072 ; 87.63,52.705 91.44,52.705 ; 90.17,75.819 90.805,75.184 102.997,75.184 104.14,74.041 104.14,68.58 ; 91.44,52.705 102.743,52.705 104.14,54.102 104.14,61.468 ; 91.44,68.072 92.075,68.072 93.091,67.056 102.616,67.056 104.14,68.58 ; 91.756,61.214 91.821,61.214 93.345,59.69 102.362,59.69 104.14,61.468 ; 104.14,61.468 104.14,68.58
  Top Layer w0.35: LCD1.1 34.889,153.071 36.068,151.892 v1(43.053,151.892)
  Bottom Layer w0.25: R31.2 36.195,107.569 38.1,109.474 v1(42.037,109.474) ; v1(42.926,70.993) 51.435,70.993 v1(53.467,68.961) 53.594,69.088 v1(59.944,69.088) 61.924,69.088 62.865,70.029 C3.1@62.408,70.487 ; v1(43.307,80.645) 47.857,80.645 FB2.1 48.311,93.22 47.117,94.413 C9.1 ; v1(46.609,47.625) 46.609,52.197 47.244,52.832 v1(50.546,52.832) ; R2.1 R3.1 R4.1 R1.1 50.089,135.966 54.102,131.953 v1(62.458,131.953) ; v1(53.213,116.078) 55.245,116.078 v1(56.769,114.554) ; R12.1 62.001,87.578 61.036,86.612 C4.1 v1(62.865,88.341) ; v1(69.469,117.729) 69.356,117.616 68.975,117.616 68.213,116.854 68.213,100.189 P4.9 ; R5.1 70.18,70.102 72.263,72.185 v1@72.263,73.787 ; C1.1 v1(74.422,87.249) ; 96.012,128.041 96.012,130.937 96.774,131.699 100.584,131.699 101.295,130.988 C12.1 ; R23.1 99.111,121.107 102.235,117.983 P3.11
  Bottom Layer w0.3: v1(34.417,112.141) R6.1 ; LCD1.1 35.299,157.727 37.465,159.893 70.898,159.893 LCD1.16 ; R31.2 45.974,104.14 47.117,102.997 C11.1 C9.1 ; v1(43.053,151.892) 49.936,151.892 R2.1 ; v1(52.959,51.816) 53.467,51.816 54.356,52.705 v1(59.944,52.705) ; v1(58.801,45.212) 60.3,45.212 C14.1 C15.1 C16.1 65.022,45.263 66.803,43.482 67.049,43.482 v1(67.183,43.348) ; v1(60.071,37.211) 62.645,37.211 v1(66.199,33.657) ; v1(62.458,131.953) 62.535,131.876 62.535,114.681 v1(62.611,114.605) ; R5.1 73.883,70.002 v1(74.924,68.961) ; v1(70.942,132.08) 82.296,132.08 ; P4.9 72.898,95.758 77.089,95.758 U2.10 ; v1(79.121,65.422) 81.771,68.072 v1(86.859,68.072) ; v1(84.684,52.045) R28.1 84.633,48.844 R29.1 84.633,43.129 90.83,36.932 v1(97.536,36.932) ; U2.19 81.661,116.205 79.121,118.745 U2.1 77.216,127 82.296,132.08 ; R23.1 99.111,125.043 98.661,125.493 98.561,125.493 96.012,128.041 91.973,132.08 82.296,132.08
  other v1: 66.548,81.026
GNDA: C7.1 C8.2 FB2.2 U1.12 U4.3 | length 44.3
  Top Layer w0.25: v1(52.934,79.223) 53.838,79.223 55.218,77.842 C8.2 57.991,77.842 59.167,79.018 59.549,79.018 59.553,79.022 60.027,79.022 U1.12
  Bottom Layer w0.25: U4.3 44.555,107.216 50.495,101.276 FB2.2 50.97,79.717 50.97,78.739 51.859,77.851 52.756,77.851 C7.1 v1(52.934,79.223)
LED1: R10.1 U1.36 | length 31.4
  Top Layer w0.25: U1.36@72.332,78.522 77.27,78.522 83.034,72.758 83.034,59.378 84.474,57.937 R10.1
LED2: R11.1 U1.38 | length 29.6
  Top Layer w0.25: U1.38 79.682,79.522 81.182,81.022 83.57,81.022 84.828,79.764 84.828,66.937 86.081,65.684 R11.1
LED3: R17.1 U1.39 | length 21.6
  Top Layer w0.25: U1.39 79.474,80.022 80.974,81.522 83.852,81.522 85.344,80.03 85.344,75.609 R17.1
LED4: R20.1 U1.40 | length 16.4
  Top Layer w0.25: U1.40 79.267,80.522 80.767,82.022 84.059,82.022 85.665,80.416 R20.1
MCU_RX1: U1.43 U3.1 | length 176.1
  Top Layer w0.25: v1(44.831,41.529) 42.926,43.434 42.926,48.086 46.41,51.57 U3.1 ; v1(67.31,26.797) 100.256,26.797 102.156,28.697 102.156,32.814 107.434,38.092 107.434,84.408 105.609,86.233 78.547,86.233 74.336,82.022 U1.43
  Bottom Layer w0.25: v1(44.831,41.529) 45.085,41.783 48.133,41.783 52.006,37.91 52.006,35.496 60.706,26.797 v1(67.31,26.797)
MCU_TX1: U1.42 U3.5 | length 162.1
  Top Layer w0.25: U3.5 50.979,48.97 51.308,48.641 51.308,41.605 50.546,40.843 v1(50.546,40.64) ; v1(66.929,28.321) 67.056,28.194 100.946,28.194 101.092,28.34 101.092,32.639 106.934,38.481 106.934,84.201 105.537,85.598 78.619,85.598 74.543,81.522 U1.42
  Bottom Layer w0.25: v1(50.546,40.64) 52.477,40.64 64.796,28.321 v1(66.929,28.321)
NetC9_2: C9.2 U1.3 Y2.1 | length 25.5
  Top Layer w0.25: v1(44.958,90.424) 44.991,90.457 49.464,90.457 55.66,84.262 58.493,84.262 59.233,83.522 U1.3
  Bottom Layer w0.25: C9.2 44.958,94.488 v1(44.958,90.424)
  Bottom Layer w0.3: C9.2 45.383,94.963 45.383,96.385 Y2.1
NetC11_2: C11.2 U1.4 Y2.2 | length 37.2
  Top Layer w0.25: v1(41.783,88.9) 50.314,88.9 55.452,83.762 58.286,83.762 59.026,83.022 60.027,83.022 U1.4
  Bottom Layer w0.25: v1(41.783,88.9) 41.783,97.282 43.815,99.314 Y2.2
  Bottom Layer w0.3: C11.2 44.933,100.122 45.72,99.335 Y2.2
NetC21_2: C21.2 C23.1 FB4.1 U6.2 | length 28.8
  Top Layer w0.3: U6.2@63.085,46.863 63.085,48.607 64.008,49.53 ; U6.2@63.085,53.492 63.085,49.945 63.5,49.53 64.008,49.53 ; C23.1 63.999,36.999 C21.2 64.44,37.54 66.074,39.174 66.074,43.597 68.885,46.407 FB4.1 68.885,46.607 68.435,47.057 68.335,47.057 65.862,49.53 64.008,49.53
NetD1_1: D1.1 R8.1 | length 2.9
  Top Layer w0.3: R8.1 D1.1
NetD1_2: D1.2 Q1.3 | length 9.2
  Top Layer w0.3: Q1.3 94.308,54.991 96.035,53.264 98.857,53.264 99.441,53.848 99.441,55.484 D1.2
NetD2_1: D2.1 R9.1 | length 2.9
  Top Layer w0.3: R9.1 99.456,65.608 D2.1
NetD2_2: D2.2 Q2.3 | length 11.2
  Top Layer w0.3: Q2.3 94.223,64.685 94.223,61.86 95.504,60.579 98.933,60.579 99.506,61.152 D2.2
NetD3_1: D3.1 R15.1 | length 2.9
  Top Layer w0.3: R15.1 D3.1
NetD3_2: D3.2 Q3.3 | length 12.2
  Top Layer w0.3: Q3.3 94.308,69.014 95.25,68.072 98.933,68.072 99.506,68.645 D3.2
NetD4_1: D4.1 R16.1 | length 2.9
  Top Layer w0.3: R16.1 D4.1
NetD4_2: D4.2 Q4.3 | length 10.2
  Top Layer w0.3: Q4.3 94.465,79.441 94.465,76.858 95.388,75.935 98.671,75.935 99.695,76.959 99.695,78.094 D4.2
NetD5_1: D5.1 R18.1 | length 3.3
  Top Layer w0.3: D5.1 46.533,32.028 48.219,33.715 48.267,33.715 48.717,34.165 R18.1
NetD5_2: D5.2 U3.23 | length 21.2
  Top Layer w0.3: D5.2 49.909,33.121 49.909,37.207 52.398,39.695 52.398,46.826 53.892,48.32 U3.23
NetD6_1: D6.1 R19.1 | length 24.3
  Top Layer w0.3: v1(41.656,38.735) 41.656,30.48 42.393,29.743 D6.1 ; R19.1 48.895,36.601 v1(48.895,39.624)
  Bottom Layer w0.3: v1(41.656,38.735) 42.545,39.624 v1(48.895,39.624)
NetD6_2: D6.2 U3.22 | length 24
  Top Layer w0.3: D6.2@48.681,29.843 D6.2 49.057,30.119 49.677,30.119 50.635,31.077 51.473,31.077 53.456,33.06 53.456,39.127 52.948,39.635 52.948,46.598 54.02,47.67 U3.22
NetD7_1: D7.1 R30.1 | length 2.3
  Top Layer w0.3: D7.1 R30.1
NetDS1_1: DS1.1 DS1.6 R23.2 | length 34.8
  Top Layer w0.25: DS1.1 93.127,122.718 v1(100.711,122.718) 100.711,110.49 98.933,108.712 DS1.6
  Bottom Layer w0.25: v1(100.711,122.718) 101.295,123.302 R23.2
NetDS1_2: DS1.2 U2.13 | length 22.4
  Bottom Layer w0.3: U2.13 89.138,100.965 92.494,104.32 92.494,113.119 DS1.2
NetDS1_3: DS1.3 U2.12 | length 24.3
  Bottom Layer w0.3: U2.12 83.055,100.206 83.055,101.47 83.82,102.235 89.63,102.235 91.944,104.548 91.944,111.129 DS1.3
NetDS1_4: DS1.4 U2.14 | length 15.3
  Bottom Layer w0.25: U2.14 90.158,103.505 91.419,104.766 91.419,110.384 90.551,111.252 DS1.4
  Bottom Layer w0.3: DS1.4@89.281,111.125 DS1.4
NetDS1_5: DS1.5 U2.15 | length 5.5
  Bottom Layer w0.3: U2.15 85.09,106.045 87.757,108.712 DS1.5
NetDS1_7: DS1.7 U2.11 | length 19.3
  Bottom Layer w0.3: U2.11 93.044,104.093 93.044,109.935 DS1.7
NetDS1_8: DS1.8 U2.16 | length 25.5
  Bottom Layer w0.3: U2.16 88.131,111.88 88.131,120.643 88.773,121.285 91.073,121.285 91.948,120.41 91.948,116.205 DS1.8
NetDS1_9: DS1.9 U2.17 | length 21.8
  Bottom Layer w0.3: U2.17 87.581,113.87 87.581,120.871 88.622,121.912 91.224,121.912 93.044,120.092 93.044,117.649 DS1.9
NetDS1_10: DS1.10 U2.18 | length 19.1
  Bottom Layer w0.3: U2.18 86.487,113.665 87.031,114.209 87.031,121.099 88.394,122.462 91.452,122.462 94.361,119.553 DS1.10
NetFB3_1: FB3.1 USB1.1 | length 37.1
  Top Layer w0.25: 59.955,49.911 59.955,48.366 59.807,48.218 59.807,44.79 FB3.1
  Top Layer w0.3: v1(52.832,54.229) 55.88,54.229 59.955,50.154 59.955,49.911 ; USB1.1 54.285,38.171 55.626,39.512 v1(55.626,40.915)
  Bottom Layer w0.3: v1(52.832,54.229) 52.832,52.962 52.059,52.189 52.059,44.482 v1(55.626,40.915)
NetLCD1_3: LCD1.3 R6.3 | length 42
  Bottom Layer w0.3: R6.3 39.964,127.213 LCD1.3
NetLCD1_7: LCD1.7 R2.2 | length 6.9
  Bottom Layer w0.3: LCD1.7 50.139,156.109 52.273,153.975 R2.2
NetLCD1_8: LCD1.8 R3.2 | length 9.8
  Bottom Layer w0.25: LCD1.8 LCD1.8@52.817,157.599
  Bottom Layer w0.3: R3.2 52.849,149.496 53.975,150.622 53.975,154.813 52.817,155.971 LCD1.8@52.817,157.599
NetLCD1_9: LCD1.9 R4.2 | length 12
  Bottom Layer w0.25: R4.2 R4.2@52.764,147.252
  Bottom Layer w0.3: R4.2@52.764,147.252 55.239,149.727 LCD1.9
NetLCD1_10: LCD1.10 R1.2 | length 15
  Bottom Layer w0.25: R1.2 R1.2@52.273,145.109
  Bottom Layer w0.3: R1.2@52.273,145.109 57.764,150.599 LCD1.10
NetQ1_1: Q1.1 R10.2 R13.2 | length 5.7
  Top Layer w0.3: R13.2 R10.2@89.518,57.837 ; R10.2 R10.2@89.518,57.837 ; Q1.1 92.159,57.387 89.968,57.387 R10.2@89.518,57.837
NetQ2_1: Q2.1 R11.2 R14.2 | length 5.2
  Top Layer w0.3: R14.2 R11.2 89.554,65.72 Q2.1
NetQ3_1: Q3.1 R17.2 R21.2 | length 5.3
  Top Layer w0.3: R21.2 R17.2 89.671,73.467 Q3.1
NetQ4_1: Q4.1 R20.2 R22.2 | length 5
  Top Layer w0.3: R22.2 R20.2 89.544,80.391 Q4.1
NetR5_2: R5.2 U1.28 | length 5.7
  Top Layer w0.25: U1.28 68.298,72.152 68.885,71.565 v1(68.885,71.501)
  Bottom Layer w0.25: R5.2 68.885,70.891 v1(68.885,71.501)
NetU3_15: U3.15 USB1.3 | length 11.3
  Top Layer w0.3: USB1.3 55.885,36.073 58.543,38.731 v1(58.543,39.751) ; U3.15 56.007,43.12 57.023,42.104 v1(57.023,41.529)
  Bottom Layer w0.3: v1(57.023,41.529) 57.023,41.4 58.543,39.88 v1(58.543,39.751)
NetU3_16: U3.16 USB1.2 | length 11.9
  Top Layer w0.3: USB1.2 55.085,37.835 58.165,40.915 58.165,43.348 57.743,43.77 U3.16
NRST: C10.2 P1.2 R7.1 S1.2 U1.7 | length 43.8
  Top Layer w0.25: P1.2 39.108,72.009 41.445,69.672 R7.1 C10.2 49.733,69.672 50.622,70.561 S1.2 50.622,73.242 52.059,74.678 52.059,79.699 52.973,80.614 52.973,80.626 54.609,82.262 57.664,82.262 58.404,81.522 U1.7
OSC_IN: C5.2 U1.5 Y1.2 | length 16.9
  Top Layer w0.25: C5.2@50.439,85.375 53.132,85.375 55.245,83.262 58.079,83.262 58.819,82.522 U1.5
  Top Layer w0.3: Y1.2 46.609,86.342 46.959,86.692 49.019,86.692 49.74,85.97 49.744,85.97 50.37,85.344 C5.2 C5.2@50.439,85.375
OSC_OUT: C6.2 U1.6 Y1.1 | length 16.9
  Top Layer w0.25: C6.2@50.421,78.969 C6.2 50.621,78.969 52.473,80.821 52.473,80.834 54.401,82.762 57.871,82.762 58.611,82.022 U1.6
  Top Layer w0.3: Y1.1 48.693,77.241 C6.2@50.421,78.969
PA2: P2.3 U1.16 | length 45.8
  Top Layer w0.25: v1(52.451,65.278) 52.451,65.841 59.673,73.063 59.673,75.802 59.69,75.819 59.69,76.713 59.974,76.997 61.181,76.997 U1.16@61.231,77.047
  Bottom Layer w0.25: P2.3 39.624,52.451 v1(52.451,65.278)
PA3: P2.4 U1.17 | length 47.1
  Top Layer w0.25: v1(52.959,63.373) 52.959,63.763 59.159,69.963 61.073,69.963 62.798,71.688 U1.17@62.798,74.797
  Bottom Layer w0.25: P2.4 37.791,49.911 51.253,63.373 v1(52.959,63.373)
PA4: P2.5 U1.20 | length 55.2
  Top Layer w0.25: v1@52.948,62.103 v1(52.959,62.103) 64.008,62.103 64.298,62.393 U1.20
  Bottom Layer w0.25: P2.5 35.958,47.371 50.69,62.103 v1@52.948,62.103
PA5: P2.6 U1.21 | length 56.9
  Top Layer w0.25: v1(52.959,60.833) 63.445,60.833 64.798,62.186 U1.21
  Bottom Layer w0.25: P2.6 34.125,44.831 50.127,60.833 v1(52.959,60.833)
PA6: P2.7 U1.22 | length 58.5
  Top Layer w0.25: v1(52.959,59.563) 62.882,59.563 65.298,61.979 U1.22
  Bottom Layer w0.25: P2.7 32.292,42.291 49.564,59.563 v1(52.959,59.563)
PA7: P2.8 U1.23 | length 60.1
  Top Layer w0.25: v1(52.959,58.293) 62.319,58.293 65.798,61.772 U1.23
  Bottom Layer w0.25: P2.8 30.46,39.751 49.002,58.293 v1@52.832,58.293
PA8: P2.9 U1.41 | length 87
  Top Layer w0.25: U1.41 77.085,81.022 v1(77.724,81.661)
  Top Layer w0.3: v1(75.438,66.294) 75.692,66.04 v1(75.692,63.119)
  Bottom Layer w0.3: P2.9 28.662,37.211 48.601,57.15 74.778,57.15 75.692,58.064 v1(75.692,63.119) ; v1(75.438,66.294) 77.597,68.453 77.597,81.534 v1(77.724,81.661) 77.802,81.661 v1@77.978,81.485
PA11: P3.3 U1.44 | length 48.8
  Top Layer w0.25: U1.44 74.129,82.522 78.362,86.755 106.854,86.755 108.52,88.421 108.52,95.696 P3.3
PA12: P3.4 U1.45 | length 53.4
  Top Layer w0.25: U1.45 73.851,83.022 78.459,87.63 v1(106.426,87.63) ; P3.4@107.188,100.203 P3.4 109.02,97.736 109.02,87.798 108.458,87.236 v1(108.458,87.122)
  Bottom Layer w0.25: v1(106.426,87.63) 107.95,87.63 v1(108.458,87.122)
PA15: P3.5 U1.50 | length 48.1
  Top Layer w0.25: U1.50 69.798,87.904 74.288,92.394 76.262,92.394 v1(77.851,90.805) ; v1(80.899,90.805) 97.752,90.805 102.862,95.915 102.862,99.941 105.664,102.743 P3.5
  Bottom Layer w0.25: v1(77.851,90.805) v1(80.899,90.805)
PB1: C18.1 R26.2 S3.1 U1.30 | length 61.1
  Top Layer w0.25: U1.30@69.298,74.549 69.302,74.545 69.302,73.249 70.161,72.39 79.756,72.39 81.012,71.134 81.012,50.532 v1(78.74,48.26)
  Top Layer w0.3: v1(82.55,42.565) 82.55,42.545 82.88,42.215 S3.1 92.786,42.215 93.777,41.224 C18.1 R26.2
  Bottom Layer w0.3: v1(78.74,48.26) 78.74,46.375 v1(82.55,42.565)
PB2: C19.1 R27.2 S4.1 U1.33 | length 67
  Top Layer w0.25: U1.33 72.589,77.022 72.614,76.997 73.028,76.997 73.053,77.022 76.624,77.022 81.534,72.112 v1(81.534,47.879)
  Top Layer w0.3: v1(84.963,38.481) 84.963,32.512 87.96,29.515 S4.1 92.507,29.515 93.777,30.785 C19.1 R27.2
  Bottom Layer w0.3: v1(81.534,47.879) 81.534,44.989 84.963,41.56 v1(84.963,38.481)
PC10: P3.6 U1.51 | length 51.1
  Top Layer w0.25: U1.51 69.298,88.111 74.081,92.894 77.006,92.894 77.824,92.075 v1(77.851,92.075) ; v1(80.899,92.202) 98.442,92.202 102.362,96.122 102.362,103.251 104.648,105.537 106.299,105.537 P3.6
  Bottom Layer w0.25: v1(77.851,92.075) 80.772,92.075 v1(80.899,92.202)
PC11: P3.7 U1.52 | length 53.5
  Top Layer w0.25: U1.52 68.798,88.318 73.873,93.394 77.743,93.394 v1(77.812,93.325) ; v1(81.026,93.472) 99.005,93.472 101.862,96.329 101.862,106.053 103.632,107.823 P3.7
  Bottom Layer w0.25: v1(77.812,93.325) 77.959,93.472 v1(81.026,93.472)
PC12: P3.8 U1.53 | length 56.6
  Top Layer w0.25: U1.53 68.298,88.542 73.736,93.98 77.229,93.98 77.844,94.595 v1(78.047,94.595) ; v1(80.899,94.742) 99.568,94.742 101.362,96.536 101.362,108.728 102.997,110.363 P3.8
  Bottom Layer w0.25: v1(78.047,94.595) 80.752,94.595 v1(80.899,94.742)
PC13: P3.9 U1.2 | length 123.3
  Top Layer w0.25: v1(47.244,115.316) 48.895,116.967 v1(48.895,126.111) ; v1(57.15,105.664) v1(57.15,109.093) ; v1(58.624,91.694) 58.624,84.85 59.446,84.028 ; 59.44,84.022 U1.2 ; v1(59.563,128.524) 92.075,128.524 v1(92.837,127.762)
  Bottom Layer w0.25: v1(47.244,115.316) 47.357,115.203 54.469,115.203 57.15,112.522 v1(57.15,109.093) ; v1(48.895,126.111) 57.15,126.111 v1(59.563,128.524) ; v1(57.15,105.664) 54.356,102.87 54.356,95.962 v1(58.624,91.694) ; v1(92.837,127.762) 96.528,124.071 96.528,119.88 103.505,112.903 P3.9
PD2: P3.10 U1.54 | length 88
  Top Layer w0.25: U1.54@67.773,86.065 67.798,86.09 U1.54 67.798,96.386 70.485,99.073 v1(70.485,109.601) ; v1(74.168,126.238) 99.568,126.238 102.489,123.317 102.489,116.586 103.632,115.443 P3.10
  Bottom Layer w0.25: v1(70.485,109.601) 70.485,122.174 68.707,123.952 68.707,125.603 69.469,126.365 74.041,126.365 v1(74.168,126.238)
RS: LCD1.4 U1.8 | length 93.1
  Top Layer w0.25: 40.767,93.472 42.926,91.313 49.911,91.313 v1(54.229,86.995) ; v1(55.372,81.387) 55.575,81.387 55.821,81.633 57.586,81.633 58.197,81.022 U1.8
  Top Layer w0.3: 40.767,93.472 v1(40.767,112.903)
  Bottom Layer w0.25: v1(54.229,86.995) 55.372,85.852 v1(55.372,81.387)
  Bottom Layer w0.3: v1(40.767,112.903) 40.767,155.98 LCD1.4
RW: LCD1.5 U1.9 | length 88.3
  Top Layer w0.25: LCD1.5 45.039,132.634 54.356,123.317 54.356,89.027 56.12,87.263 v1(56.12,86.628) ; v1(55.753,80.137) 55.753,80.231 56.654,81.133 57.379,81.133 57.99,80.522 U1.9
  Bottom Layer w0.25: v1(55.753,80.137) 55.753,80.34 56.247,80.834 56.247,86.501 v1(56.12,86.628)
SCL: R24.1 U1.58 U5.6 | length 34.6
  Top Layer w0.25: U5.6 61.214,113.284 ; R24.1 64.059,112.774 63.584,113.249 63.484,113.249 63.449,113.284 61.214,113.284 ; U1.58 65.798,94.709 63.569,96.938 63.569,110.929 61.214,113.284
SDA: R25.1 U1.59 U5.5 | length 45.6
  Top Layer w0.25: R25.1 64.059,117.219 63.584,117.694 63.484,117.694 62.687,118.491 58.42,118.491 55.894,115.965 55.894,112.762 56.642,112.014 U5.5 60.579,112.014 62.56,110.033 62.56,97.206 65.298,94.468 U1.59
Seg1: P4.1 U1.26 U2.2 | length 77.5
  Top Layer w0.25: U1.26 67.298,70.425 67.887,69.836 77.711,69.836 v1(79.906,67.641) ; v1(81.407,112.574) 81.471,112.511 81.471,100.393 v1(81.534,100.33)
  Bottom Layer w0.25: U2.2 80.01,116.205 81.407,114.808 v1(81.407,112.574) ; v1(79.906,67.641) 80.341,67.641 83.171,70.471 83.171,99.074 81.915,100.33 v1(81.534,100.33)
  Bottom Layer w0.3: P4.1 72.898,116.078 77.089,116.078 U2.2
Seg2: P4.2 U1.27 U2.3 | length 72.2
  Top Layer w0.25: U1.27 67.798,70.632 68.044,70.386 78.26,70.386 79.685,68.961 v1(80.01,68.961) ; v1(78.994,102.489) v1(78.994,104.902) ; v1(82.296,98.679) 82.409,98.792 v1(82.409,102.489)
  Bottom Layer w0.25: U2.3 78.994,111.887 v1(78.994,104.902) ; v1(78.994,102.489) v1(82.409,102.489) ; v1(80.01,68.961) 80.264,68.961 82.55,71.247 82.55,98.425 v1(82.296,98.679)
  Bottom Layer w0.3: P4.2 72.898,113.538 77.089,113.538 U2.3
Seg3: P4.3 U1.55 U2.4 | length 33.5
  Top Layer w0.25: U1.55 67.298,96.593 67.299,96.594 67.299,109.26 68.797,110.758 72.658,110.758 P4.3
  Bottom Layer w0.3: P4.3 72.898,110.998 77.089,110.998 U2.4
Seg4: P4.4 U1.56 U2.5 | length 37.4
  Top Layer w0.25: U1.56 66.798,96.8 66.799,96.801 66.799,109.725 68.707,111.633 v1(69.088,111.633)
  Bottom Layer w0.25: v1(69.088,111.633) 69.088,109.22 69.977,108.331 P4.4
  Bottom Layer w0.3: P4.4 72.898,108.458 77.089,108.458 U2.5
Seg5: P4.5 U1.57 U2.6 | length 63.3
  Top Layer w0.25: U1.57 66.298,97.007 66.299,97.008 66.299,109.932 67.564,111.197 67.564,117.519 69.915,119.87 78.758,119.87 79.248,119.38 79.248,107.868 77.425,106.045 U2.6
  Bottom Layer w0.3: P4.5 72.898,105.918 77.089,105.918 U2.6
Seg6: P4.6 U1.61 U2.7 | length 93.6
  Top Layer w0.25: U1.61 64.298,93.872 63.174,94.996 56.388,94.996 55.394,95.99 55.394,118.607 58.58,121.793 78.956,121.793 80.869,119.88 80.869,114.736 v1(82.931,112.674)
  Bottom Layer w0.25: U2.7 80.645,103.505 82.931,105.791 v1(82.931,112.674)
  Bottom Layer w0.3: P4.6 72.898,103.378 77.089,103.378 U2.7
Seg7: P4.7 U1.62 U2.8 | length 84.4
  Top Layer w0.25: v1(58.801,110.744) 59.182,110.744 v1(61.087,108.839) ; v1(61.341,126.365) 69.291,126.365 70.942,124.714 v1(70.942,124.511) ; v1(63.085,93.599) 63.798,92.886 U1.62@63.798,86.772 ; P4.7 75.057,102.997 v1(75.057,118.11)
  Bottom Layer w0.25: v1(58.801,110.744) 58.801,117.45 61.341,119.99 v1(61.341,126.365) ; v1(61.087,108.839) 63.085,106.841 v1(63.085,93.599) ; v1(70.942,124.511) 75.057,120.396 v1(75.057,118.11)
  Bottom Layer w0.3: P4.7 72.898,100.838 77.089,100.838 U2.8
Seg8: P4.8 U1.29 U2.9 | length 50.9
  Top Layer w0.254: U1.29@68.8,74.194 68.8,73.041 70.086,71.755 79.045,71.755 80.137,70.663 v1(80.137,70.231)
  Bottom Layer w0.25: U2.9 79.629,98.425 82.05,96.004 82.05,72.144 v1(80.137,70.231)
  Bottom Layer w0.3: P4.8 72.898,98.298 77.089,98.298 U2.9
SW1: R28.2 S5.1 U1.34 | length 41.5
  Top Layer w0.25: U1.34@72.846,77.522 76.856,77.522 82.034,72.344 82.034,55.583 82.55,55.067 v1(82.55,54.864)
  Bottom Layer w0.3: v1(82.55,54.864) 83.563,54.864 83.828,54.599 84.771,54.599 86.487,52.883 86.487,49.276 R28.2 87.122,49.149 S5.1
SW2: R29.2 S5.2 U1.35 | length 50
  Top Layer w0.25: U1.35 77.063,78.022 82.534,72.551 82.534,57.166 v1(84.201,55.499)
  Bottom Layer w0.3: v1(84.201,55.499) 87.63,55.499 92.329,50.8 92.329,46.785 92.153,46.609 S5.2 86.843,46.609 R29.2
SWCLK: P1.4 U1.49 | length 142.6
  Top Layer w0.25: v1(26.797,77.47) 26.67,77.597 26.67,109.074 30.761,113.165 39.704,113.165 44.014,117.475 v1(45.085,117.475) ; v1(59.69,119.888) 60.172,120.37 78.965,120.37 79.869,119.466 79.869,99.19 79.524,98.845 79.524,90.062 78.108,88.646 71.247,88.646 70.298,87.697 U1.49
  Bottom Layer w0.25: v1(26.797,77.47) 26.035,76.708 26.035,68.961 P1.4 ; v1(45.085,117.475) 57.277,117.475 v1(59.69,119.888)
SWDIO: P1.3 U1.46 | length 141.6
  Top Layer w0.25: P1.3 26.763,69.469 25.922,70.31 25.922,109.107 30.48,113.665 39.497,113.665 v1(44.45,118.618) ; v1(58.952,120.918) 79.124,120.918 80.369,119.673 80.369,98.983 80.024,98.638 80.024,89.855 78.299,88.13 78.252,88.13 73.644,83.522 U1.46
  Bottom Layer w0.25: v1(44.45,118.618) 56.642,118.618 58.942,120.918 v1(58.952,120.918)
VBAT: P3.2 U1.1 | length 113.1
  Top Layer w0.25: v1(60.725,90.043) 60.756,90.043 60.902,89.897 60.902,84.547 U1.1@60.96,84.547 ; U1.1@60.877,84.547 U1.1 60.935,84.522 U1.1@60.96,84.547 ; U1.1@61.722,84.547 U1.1@60.96,84.547 ; v1(73.533,61.595) v1(77.597,61.595)
  Bottom Layer w0.25: v1(60.725,90.043) 58.526,90.043 57.531,89.048 57.531,81.534 59.173,79.892 59.173,74.822 59.582,74.413 65.395,74.413 65.786,74.022 65.786,61.859 66.05,61.595 v1(73.533,61.595) ; v1(77.597,61.595) 97.282,61.595 103.632,67.945 103.632,92.202 P3.2
VCCIO: C13.2 R18.2 R19.2 U3.4 U3.17 | length 42.9
  Top Layer w0.3: R18.2 R19.2 46.533,36.524 46.083,36.974 46.083,42.59 44.577,44.095 44.577,47.447 46.75,49.62 U3.4 v1(53.557,49.62) ; v1(53.848,45.466) 54.894,44.42 U3.17 58.184,44.42 58.662,43.942 v1(58.852,43.942) ; v1(61.722,39.141) 62.11,39.53 62.11,41.485 C13.2
  Bottom Layer w0.3: v1(53.557,49.62) 53.557,45.757 v1(53.848,45.466) ; v1(58.852,43.942) 58.852,42.012 v1(61.722,39.141)
pads on no net: LCD1.0 U3.2 U3.3 U3.6 U3.8 U3.9 U3.10 U3.11 U3.12 U3.13 U3.14 U3.19 U3.24 U3.27 U3.28 USB1.4 USB1.6 USB1.7 USB1.8 USB1.9 USB1.MH1 USB1.MH2

## Polygon pours and split planes (outlines as drawn)
GND on Top Layer (solid, remove dead copper, pour order 2): 25.4,161.29 109.601,161.29 109.601,25.781 25.4,25.781
GND on Bottom Layer (solid, remove dead copper, pour order 4): 25.4,161.29 109.601,161.29 109.601,25.781 25.4,25.781

## Keep-outs
Keep-Out Layer:
  the board outline again, w0.254

## Other copper
Top Layer:
  rectangle net GND: 64.135,78.613 68.961,83.312
Bottom Layer:
  rectangle net GND: 64.135,78.613 68.961,83.312
  rectangle net 3V3: 69.215,78.74 70.993,85.344
  rectangle net 3V3: 61.976,76.2 69.85,78.283
  rectangle net 3V3: 61.976,76.2 63.798,84.455